# Altium PCB PCB_n.PcbDoc
Units mm, origin at the board's own origin, x right, y up, seen from the top; angles counter-clockwise.
Board outline 100.71 x 102.01 mm, 2 copper layers (Top Layer, Bottom Layer); 26 components, 31 nets, 100 pads, 7 vias.
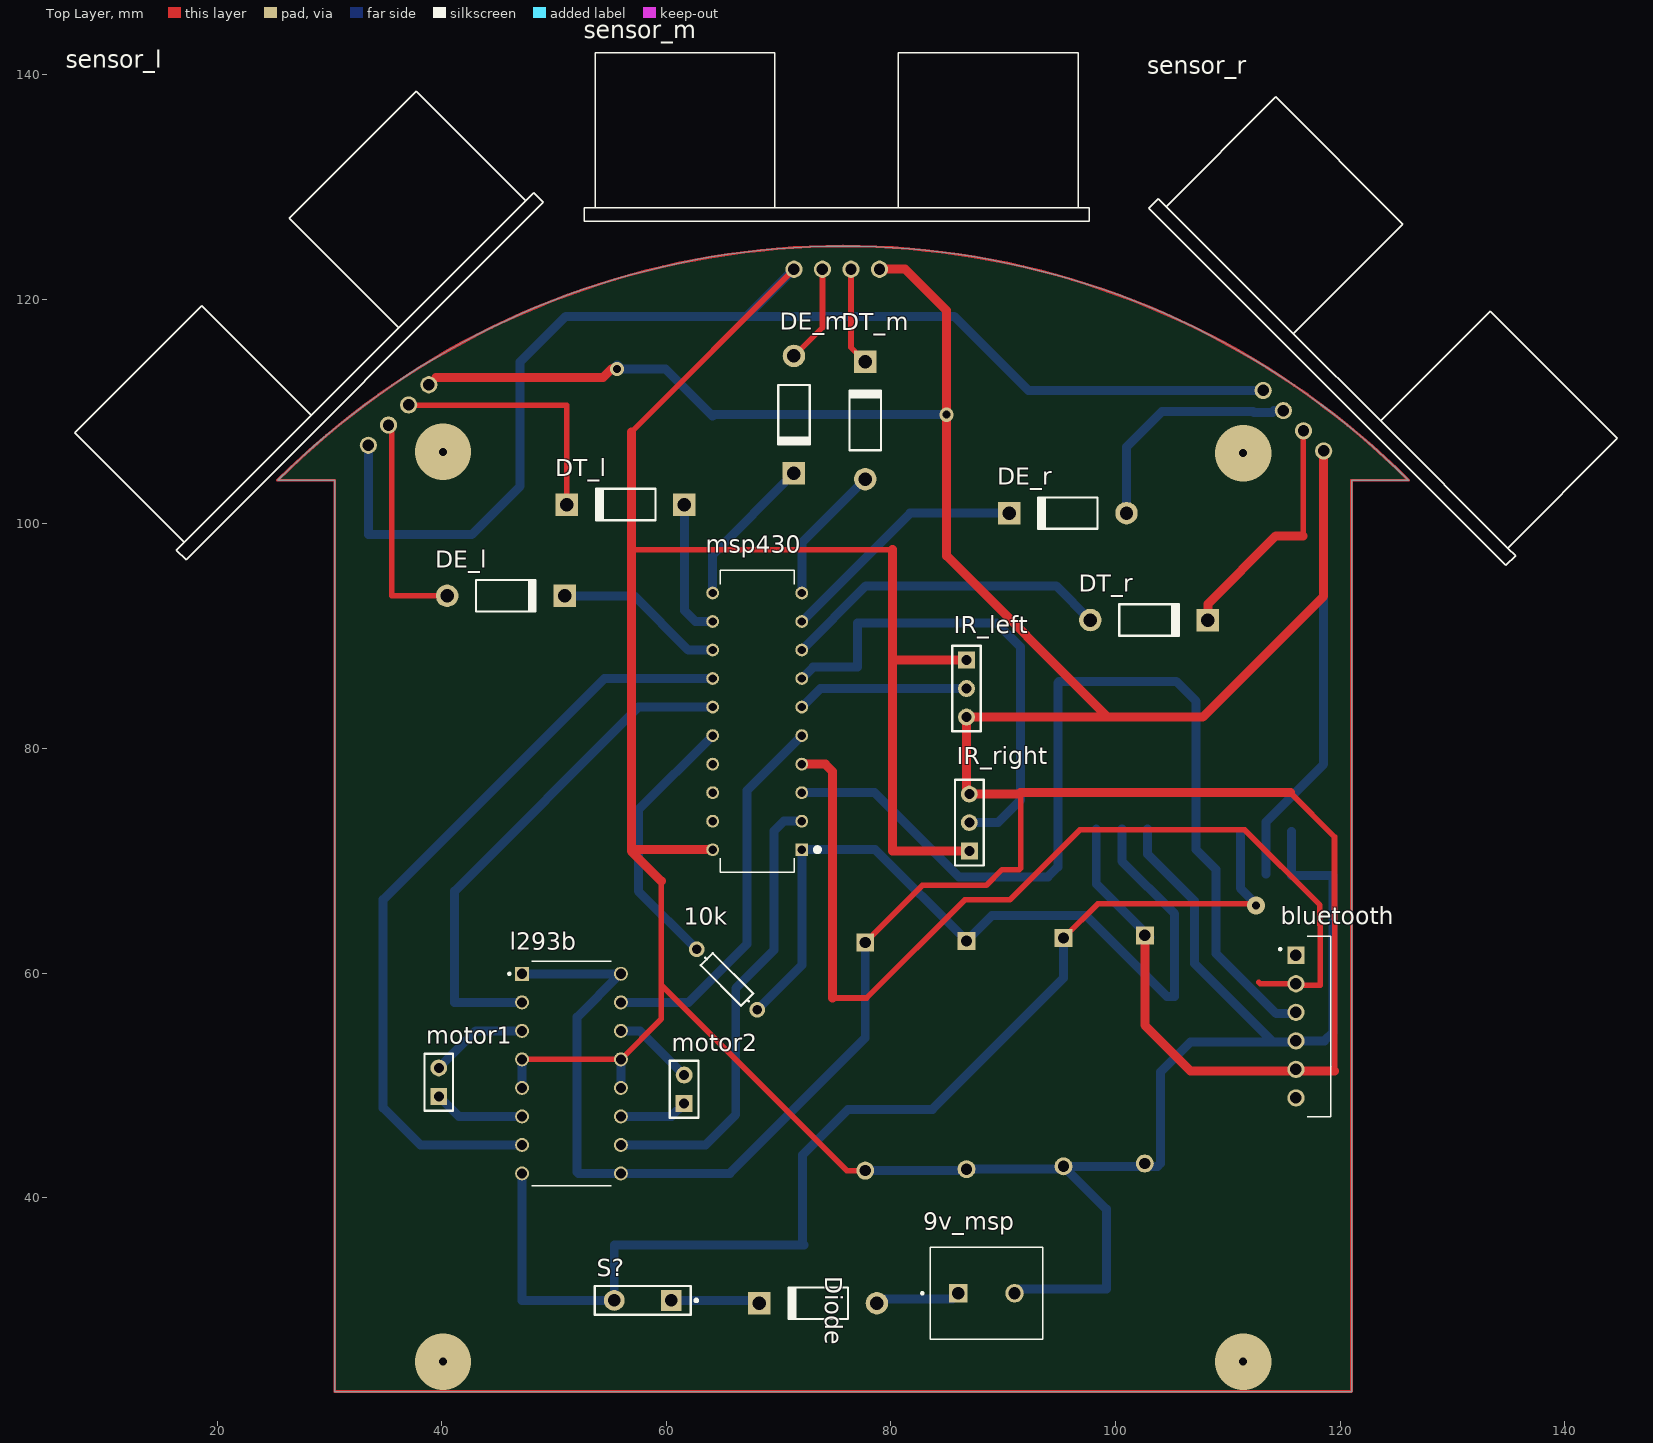
[diagram p0: Top Layer view]
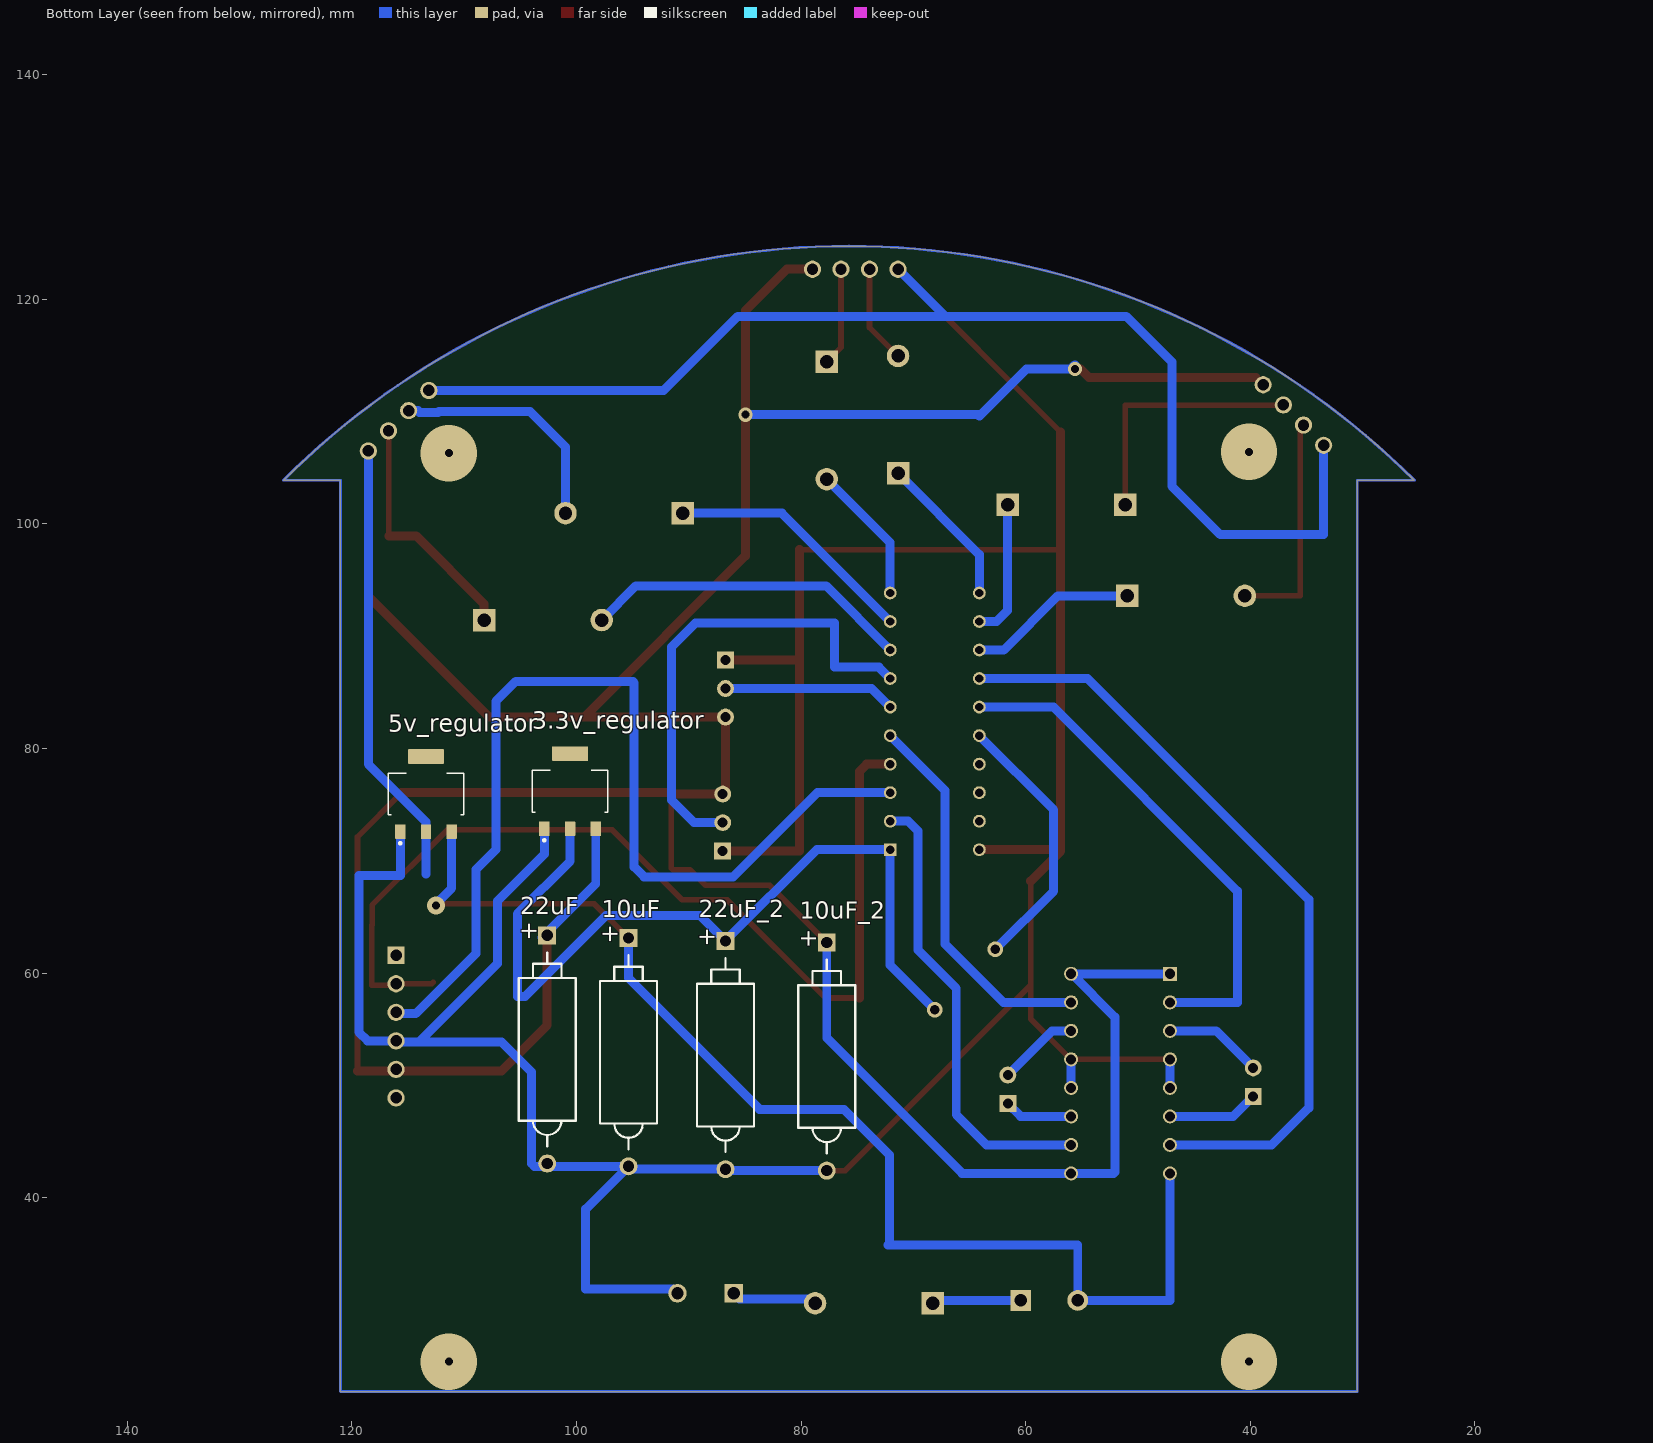
[diagram p1: Bottom Layer view, seen from below]

## Layer stack, top to bottom
Top Solder: solder mask 0.0102, Solder Resist, Dk 3.5
Top Layer: signal copper 0.0356
Dielectric 1: dielectric 0.32, FR-4, Dk 4.8
Bottom Layer: signal copper 0.0356
Bottom Solder: solder mask 0.0102, Solder Resist, Dk 3.5

## Board outline
30.48,22.733 30.48,103.886 25.4,103.886 cw(c75.755,53.53) 126.111,103.886 121.031,103.886 121.031,22.733

## Design rules (kind name [scope] priority, off if disabled: settings)
Clearance [All] p1: gap=0.8 ignorepadtopadclearanceinfootprint=FALSE
DiffPairsRouting [All] p1: maxlimit=0.6 minlimit=0.4 mostfreqgap=0.5 toplayer_minwidth=0.381 toplayer_maxwidth=0.6 toplayer_prefwidth=0.381 bottomlayer_minwidth=0.381 bottomlayer_maxwidth=0.6 bottomlayer_prefwidth=0.381 maxuncoupledlength=12.7
HoleSize [All] p1: absolutevalues=TRUE maxlimit=2.54 minlimit=0.7 maxpercent=80.000 minpercent=20.000
HoleToHoleClearance [All] p1: gap=0.7 allowstackedmicrovias=TRUE
MinimumSolderMaskSliver [All] p1: minsoldermaskwidth=0.7
PasteMaskExpansion [All] p1: expansion=0.5
PolygonConnect [All] p1: connectstyle=Relief reliefconductorwidth=0.254 reliefentries=4 polygonreliefangle="90 Angle" airgapwidth=0.254
RoutingVias [All] p1: holewidth=0.711 width=1.6 viastyle="Through Hole" minholewidth=0.711 minwidth=1.27 maxholewidth=0.711 maxwidth=1.27
SolderMaskExpansion [All] p1: expansion=0.3 useseparateexpansions=TRUE expansionbottom=0.3
Width [All] p1: maxlimit=1 minlimit=0.4 preferedwidth=0.8 toplayer_prefwidth=0.5 minimp=50.000000 maximp=50.000000 favimp=50.000000
25 further rules are at their usual default settings.

## Components (designator, comment, footprint, x,y, rotation, side; value= is the part's Value field where it differs from the comment)
3.3v_regulator "AMS1117-3.3" SOT229P700X180-4N 100.584,76.2 r180 bottom
5v_regulator "AMS1117-5.0" SOT229P700X180-4N 113.411,75.946 r180 bottom
9v_msp "282836-2" CONN_282836-2 88.519,31.496 r0 top
10k "Res1" AXIAL-0.3 65.405,59.436 r135 top value=1K
10uF "Cap Pol2" POLAR0.8 95.377,52.959 r90 bottom value=10uF
10uF_2 "Cap Pol2" POLAR0.8 77.724,52.578 r90 bottom value=100pF
22uF "Cap Pol2" POLAR0.8 102.616,53.213 r90 bottom value=100pF
22uF_2 "Cap Pol2" POLAR0.8 86.741,52.705 r90 bottom value=100pF
bluetooth "ZC142200" MODULE_ZC142200 116.078,55.245 r0 top
DE_l "Diode 1N4001" DO-41#1 45.72,93.599 r0 top
DE_m "Diode 1N4001" DO-41#1 71.374,109.728 r270 top
DE_r "Diode 1N4001" DO-41#1 95.758,100.965 r180 top
Diode "Diode 1N4001" DO-41#1 73.533,30.607 r180 top
DT_l "Diode 1N4001" DO-41#2 56.388,101.727 r180 top
DT_m "Diode 1N4001" DO-41#1 77.724,109.22 r90 top
DT_r "Diode 1N4001" DO-41#1 102.997,91.44 r0 top
IR_left "Header 3" HDR1X3 86.741,87.884 r270 top
IR_right "Header 3" HDR1X3 86.995,70.866 r90 top
l293b "L293D" DIP880W50P254L2000H510Q16 51.562,51.054 r0 top
motor1 "Header 2" HDR1X2 39.751,49.022 r90 top
motor2 "Header 2" HDR1X2 61.595,48.387 r90 top
msp430 "MSP430G2553IN20" DIP794W45P254L2692H508Q20 68.105,82.423 r180 top
S? "SW-SPST" SPST-2 57.912,30.861 r180 top
sensor_l "HC-SR04" XCVR_HC-SR04 36.168,109.701 r225 top
sensor_m "HC-SR04" XCVR_HC-SR04 75.184,122.682 r180 top
sensor_r "HC-SR04" XCVR_HC-SR04 115.851,109.193 r135 top

## Footprints (in the part's own frame and the unit in brackets; to place one, negate y for a bottom-side part, rotate by r counter-clockwise, add the part's x,y. Pads: shape width x height; smd on the part's side, far side on the other; paste and mask are expansions set on the pad)
AXIAL-0.3 [mm] "Axial Device, Thru-Hole; 2 Leads; 0.3 in Pin Spacing"
  round 1.4 hole 0.85: 1(-3.81,0) 2(3.81,0)
  silkscreen extent -2.77,-0.76 2.77,0.76
CONN_282836-2 [mm]
  rect 1.65x1.65 hole 1.1: 1(-2.5,0)
  round 1.65 hole 1.1: 2(2.5,0)
  silkscreen extent -5.8,-4.1 5,4.1
DIP794W45P254L2692H508Q20 [mm]
  rect 1.14x1.14 hole 0.74: 1(-3.97,11.43)
  round 1.14 hole 0.74: 2(-3.97,8.89) 3(-3.97,6.35) 4(-3.97,3.81) 5(-3.97,1.27) 6(-3.97,-1.27) 7(-3.97,-3.81) 8(-3.97,-6.35) 9(-3.97,-8.89) 10(-3.97,-11.43) 11(3.97,-11.43) 12(3.97,-8.89) 13(3.97,-6.35) 14(3.97,-3.81) 15(3.97,-1.27) 16(3.97,1.27) 17(3.97,3.81) 18(3.97,6.35) 19(3.97,8.89) 20(3.97,11.43)
  silkscreen extent -5.57,-13.46 3.3,13.46
DIP880W50P254L2000H510Q16 [mm]
  rect 1.25x1.25 hole 0.9: 1(-4.4,8.89)
  round 1.25 hole 0.9: 2(-4.4,6.35) 3(-4.4,3.81) 4(-4.4,1.27) 5(-4.4,-1.27) 6(-4.4,-3.81) 7(-4.4,-6.35) 8(-4.4,-8.89) 9(4.4,-8.89) 10(4.4,-6.35) 11(4.4,-3.81) 12(4.4,-1.27) 13(4.4,1.27) 14(4.4,3.81) 15(4.4,6.35) 16(4.4,8.89)
  silkscreen extent -5.62,-10 3.55,10
DO-41#1 [mm] "Diode, Axial; Body 5.2 x 2.7 mm (LxDia. max), Lead Dia. 0.86 mm (max)"
  round 2 hole 1.2: 1(-5.23,0)
  rect 2x2 hole 1.2: 2(5.23,0)
  silkscreen extent -2.65,-1.4 2.75,1.4
DO-41#2 [mm] "Diode, Axial; Body 5.2 x 2.7 mm (LxDia. max), Lead Dia. 0.86 mm (max)"
  rect 2x2 hole 1.2: 1(-5.23,0) 2(5.23,0)
  silkscreen extent -2.65,-1.4 2.75,1.4
HDR1X2 [mm] "Connector; Header; 2 Position"
  rect 1.5x1.5 hole 0.9: 1(0,0)
  round 1.5 hole 0.9: 2(2.54,0)
  silkscreen extent -1.27,-1.27 3.81,1.27
HDR1X3 [mm] "Connector; Header; 3 Position"
  rect 1.5x1.5 hole 0.9: 1(0,0)
  round 1.5 hole 0.9: 2(2.54,0) 3(5.08,0)
  silkscreen extent -1.27,-1.27 6.35,1.27
MODULE_ZC142200 [mm]
  rect 1.53x1.53 hole 1.02: 1(0,6.35)
  round 1.53 hole 1.02: 2(0,3.81) 3(0,1.27) 4(0,-1.27) 5(0,-3.81) 6(0,-6.35)
  silkscreen extent -1.5,-8.05 3.1,8.05
POLAR0.8 [mm] "Polarized Capacitor; 2 Leads"
  rect 1.6x1.6 hole 1: 1(10.16,0)
  round 1.6 hole 1: 2(-10.16,0)
  silkscreen extent -8.64,-2.54 8.64,2.54
SOT229P700X180-4N [mm]
  rrect15% 0.93x1.31 smd: 1(-2.29,-3.345) 2(0,-3.345) 3(2.29,-3.345)
  rrect15% 3.24x1.31 smd: 4(0,3.345)
  silkscreen extent -3.36,-4.47 3.36,1.86
SPST-2 [mm] "Switch; 2 Leads"
  rect 1.85x1.85 hole 1.1: 1(-2.54,0)
  round 1.85 hole 1.1: 2(2.54,0)
  silkscreen extent -4.89,-1.27 4.28,1.27
XCVR_HC-SR04 [mm]
  round 1.53 hole 1.02: 1(-3.81,0) 2(-1.27,0) 3(1.27,0) 4(3.81,0)
  silkscreen extent -22.5,-19.27 22.5,-4.27

## Part data
3.3v_regulator: "Sot223/Pkg 1-Amp 3.3-Volt Low Drop Out Voltage Regulatator", Package=None, Availability=Unavailable, MF="Advanced Monolithic Systems", MP=AMS1117-3.3, Price=None, SnapEDA_Link=https://www.snapeda.com/parts/AMS1117-3.3/Advanced%20Monolithic%20Systems/view-part/53450/?ref=snap
5v_regulator: "Sot223/Pkg 1-Amp 5-Volt Low Drop Out Voltage Regulatator", Package=None, Availability=Unavailable, MF="Advanced Monolithic Systems", MP=AMS1117-5.0, Price=None, SnapEDA_Link=https://www.snapeda.com/parts/AMS1117-5.0/Advanced%20Monolithic%20Systems/view-part/184433/?ref=snap
9v_msp: "Connector, Terminal Block; Wire Receptacle; 2 Pos.; 16-30 AWG; 0.197 in. CL; Sid", Package=None, Availability=Unavailable, Centerline_Pitch="5 mm[.197 in]", EU_RoHS_Compliance="Compliant with Exemptions", MF="TE Connectivity", MP=282836-2, Number_of_Positions=2, Price=None, SnapEDA_Link=https://www.snapeda.com/parts/282836-2/TE%20Connectivity%20AMP%20Connectors/view-part/492233/?ref=snap, TE_purchase_URL=https://www.te.com/usa-en/product-282836-2.html?te_bu=Cor&te_type=disp&te_campaign=seda_glo_cor-seda-global-disp-prtnr-fy19-seda-model-bom-cta_sma-317_1&elqCampaignId=32493
10k: "Resistor", LatestRevisionDate=17-Jul-2002, LatestRevisionNote="Re-released for DXP Platform.", PackageDescription="Axial Device, Thru-Hole; 2 Leads; 0.3 in Pin Spacing", PackageReference=AXIAL-0.3, Published=8-Jun-2000, Publisher="Altium Limited"
10uF 10uF_2 22uF 22uF_2: "Polarized Capacitor (Axial)", LatestRevisionDate=17-Jul-2002, LatestRevisionNote="Re-released for DXP Platform.", PackageDescription="Polarized Capacitor; 2 Leads", PackageReference=POLAR0.8, Published=8-Jun-2000, Publisher="Altium Limited"
bluetooth: "1pc HC-05 6 Pin Wireless Bluetooth RF Transceiver Module Serial For Arduino", Package=None, Availability=Unavailable, MF=YKS, MP=ZC142200, Price=None, SnapEDA_Link=https://www.snapeda.com/parts/ZC142200/YKS/view-part/618924/?ref=snap
DE_l DE_m DE_r Diode DT_l DT_m DT_r: "1 Amp General Purpose Rectifier", Code_JEDEC=DO-204-AL, ComponentLink1Description="Manufacturer Link", ComponentLink1URL=http://www.fairchildsemi.com/, ComponentLink2Description=Datasheet, ComponentLink2URL=http://www.fairchildsemi.com/ds/1N%2F1N4001.pdf, DatasheetVersion=1998, LatestRevisionDate=17-Jul-2002, LatestRevisionNote="Re-released for DXP Platform.", PackageDescription="Diode, Axial; Body 5.2 x 2.7 mm (LxDia. max), Lead Dia. 0.86 mm (max)", PackageReference=DO-41, PackageVersion=Aug-1999, Published=8-Jun-2000, Publisher="Altium Limited"
IR_left IR_right: "Header, 3-Pin", LatestRevisionDate=17-Jul-2002, LatestRevisionNote="Re-released for DXP Platform.", Publisher="Altium Limited"
l293b: "Bipolar Motor Driver Parallel 16-PowerDIP", Package="SOIC-20 STMicroelectronics", Availability=Unavailable, MF=STMicroelectronics, MP=L293D, Price=None, SnapEDA_Link=https://www.snapeda.com/parts/L293D/STMicroelectronics/view-part/83726/?ref=snap
motor1 motor2: "Header, 2-Pin", LatestRevisionDate=17-Jul-2002, LatestRevisionNote="Re-released for DXP Platform.", Publisher="Altium Limited"
msp430: "MSP430 MSP430G2xx Microcontroller IC 16-Bit 16MHz 16KB _16K x 8_ FLASH 20-PDIP", Package="PDIP-20 Texas Instruments", Availability=Unavailable, MF="Texas Instruments", MP=MSP430G2553IN20, Price=None, SnapEDA_Link=https://www.snapeda.com/parts/MSP430G2553IN20/Texas%20Instruments/view-part/46372/?ref=snap
S?: "Single-Pole, Single-Throw Switch", LatestRevisionDate=17-Jul-2002, LatestRevisionNote="Re-released for DXP Platform.", PackageDescription="Switch; 2 Leads", PackageReference=SPST-2, Published=24-Mar-1999, Publisher="Altium Limited"
sensor_l sensor_m sensor_r: "HC-SR04 Ultrasonic Sensor Platform Evaluation Expansion Board", Package=None, Availability=Unavailable, MF="SparkFun Electronics", MP=HC-SR04, Price=None, SnapEDA_Link=https://www.snapeda.com/parts/HC-SR04/SparkFun%20Electronics/view-part/341106/?ref=snap

## Via types
v1: diameter 5, hole 0.711, Top Layer to Bottom Layer, 4 vias
v2: diameter 1.27, hole 0.711, Top Layer to Bottom Layer, 2 vias
v3: diameter 1.6, hole 0.711, Top Layer to Bottom Layer, 1 vias

## Nets (pads, with @x,y where several pads share a name; then routed paths per layer and width w, separated by ;. In a path a pad name is that pad's centre, name@x,y a point inside that pad or via, vN(x,y) a via of type N, cw(c..) or ccw(c..) an arc to the next point about the centre after c; other vN are vias at no path point)
3.3v: 3.3v_regulator.2 10k.1 22uF_2.1 msp430.1 | length 73.3
  Bottom Layer w0.8: 10k.1 72.075,60.718 msp430.1 78.613,70.993 22uF_2.1 89.002,65.126 97.384,65.126 104.597,57.912 105.283,57.912 105.283,65.278 100.584,69.977 3.3v_regulator.2
5v: 3.3v_regulator.3 5v_regulator.2 10uF_2.1 22uF.1 bluetooth.5 IR_left.3 IR_right.3 l293b.1 l293b.9 l293b.16 sensor_l.1 sensor_m.1 sensor_r.1 | length 378.1
  Top Layer w0.5: sensor_l.1 39.497,113.03 ; v2@55.118,113.792 v2(55.626,113.792) ; 10uF_2.1 82.809,67.823 88.524,67.823 89.916,69.215 91.44,69.215 ; IR_right.3@86.741,76.2 IR_right.3 ; 91.567,69.342 91.567,75.946 91.567,76.073 ; 115.57,76.073 119.507,72.136 119.507,64.83 119.537,64.8 119.537,58.39 119.507,58.36 119.507,51.308
  Top Layer w0.8: 39.497,113.03 54.356,113.03 v2@55.118,113.792 ; sensor_m.1 81.28,122.682 84.963,118.999 v2(84.963,109.728) 84.963,97.155 99.251,82.867 ; IR_right.3@86.741,76.2 IR_left.3 107.772,82.804 118.545,93.577 sensor_r.1 ; IR_right.3 91.567,75.946 ; 91.567,76.073 115.57,76.073 ; 22uF.1 102.616,55.372 106.68,51.308 119.507,51.308
  Bottom Layer w0.8: l293b.1 l293b.16@55.921,59.944 ; v2(55.626,113.792) 55.626,114.173 56.007,113.792 59.944,113.792 64.135,109.601 64.262,109.728 v2(84.963,109.728) ; l293b.16 l293b.16@55.921,59.944 ; 10uF_2.1 77.724,54.229 65.659,42.164 l293b.9 52.197,42.164 52.07,42.291 52.07,56.093 l293b.16@55.921,59.944 ; 3.3v_regulator.3 98.294,67.949 22uF.1@103.06,63.182 ; 113.411,68.834 5v_regulator.2 113.411,73.482 118.545,78.616 sensor_r.1
9v: 5v_regulator.3 10uF.1 l293b.8 S?.2 | length 108.4
  Top Layer w0.5: 10uF.1 98.425,66.167 112.395,66.167 v3(112.522,66.04)
  Bottom Layer w0.8: l293b.8 47.162,30.861 S?.2 55.372,35.814 72.263,35.814 72.136,35.941 72.136,43.815 76.2,47.879 83.693,47.879 95.377,59.563 10uF.1 ; 5v_regulator.3 111.121,67.568 v3@112.649,66.04
E_l: DE_l.2 msp430.13 | length 15.2
  Bottom Layer w0.8: DE_l.2 57.15,93.599 61.976,88.773 msp430.13
E_m: DE_m.2 msp430.11 | length 13.6
  Bottom Layer w0.8: msp430.11 64.135,97.259 DE_m.2
E_r: DE_r.2 msp430.9 | length 22.5
  Bottom Layer w0.8: msp430.9 81.727,100.965 DE_r.2
GND: 3.3v_regulator.1 5v_regulator.1 9v_msp.2 10uF.2 10uF_2.2 22uF.2 22uF_2.2 bluetooth.4 IR_left.1 IR_right.1 l293b.4 l293b.5 l293b.12 l293b.13 msp430.20 sensor_l.4 sensor_m.4 sensor_r.4 | length 419.5
  Top Layer w0.5: l293b.4 l293b.13 59.563,55.925 59.563,68.199 ; 56.896,97.714 80.137,97.714 ; 56.896,108.204 sensor_m.4 ; 59.563,58.928 76.073,42.418 10uF_2.2 ; 22uF_2.2 22uF_2.2@87.249,42.545
  Top Layer w0.8: 56.896,70.993 msp430.20 ; 56.896,108.204 56.896,70.866 59.563,68.199 ; 80.137,97.714 80.137,87.884 ; IR_left.1 80.137,87.884 ; IR_right.1 80.137,70.866 80.137,87.884
  Bottom Layer w0.8: sensor_l.4 33.474,99.06 42.672,99.06 46.99,103.378 46.99,114.427 51.054,118.491 67.183,118.491 sensor_m.4 sensor_m.4@71.628,122.428 ; l293b.5 l293b.4 ; l293b.12 l293b.13 ; 65.659,118.491 85.649,118.491 92.253,111.887 sensor_r.4 ; 10uF_2.2 86.614,42.418 22uF_2.2 95.123,42.545 10uF.2 ; 9v_msp.2 91.4,31.877 99.187,31.877 99.187,38.989 10uF.2 ; 3.3v_regulator.1 102.874,70.608 107.061,66.421 107.061,60.85 114.063,53.848 ; bluetooth.4@115.57,53.975 bluetooth.4@115.697,53.975 ; 5v_regulator.1 115.701,68.707 119.38,68.707 119.38,54.737 118.618,53.975 bluetooth.4@115.697,53.975 ; 10uF.2 103.759,42.799 104.013,43.053 104.013,51.181 106.68,53.848 114.063,53.848 ; 114.063,53.848 115.57,53.848 bluetooth.4@115.697,53.975
IR_l_out: IR_left.2 msp430.6 | length 15.3
  Bottom Layer w0.8: msp430.6 73.726,85.344 IR_left.2
IR_r_out: IR_right.2 msp430.7 | length 43.7
  Bottom Layer w0.8: msp430.7 73.091,87.249 77.028,87.249 77.028,91.186 89.408,91.186 91.567,89.027 91.567,75.438 89.535,73.406 IR_right.2
left1: l293b.6 motor1.1 | length 8.1
  Bottom Layer w0.8: motor1.1 41.529,47.244 l293b.6
left2: l293b.11 motor2.1 | length 6.1
  Bottom Layer w0.8: l293b.11 60.452,47.244 motor2.1
m1_b: l293b.7 msp430.14 | length 69.8
  Bottom Layer w0.8: l293b.7 38.1,44.704 34.798,48.006 34.798,66.548 54.483,86.233 msp430.14
m1_f: l293b.2 msp430.15 | length 45.7
  Bottom Layer w0.8: l293b.2 41.148,57.404 41.148,67.31 57.531,83.693 msp430.15
m2_b: l293b.10 msp430.2 | length 40.9
  Bottom Layer w0.8: l293b.10 63.5,44.704 66.192,47.396 66.192,58.649 69.596,62.052 69.596,72.644 70.485,73.533 msp430.2
m2_f: l293b.15 msp430.5 | length 34
  Bottom Layer w0.8: l293b.15 62.001,57.404 67.183,62.586 67.183,76.261 msp430.5
Net9v_msp_1: 9v_msp.1 Diode.1 | length 7.6
  Bottom Layer w0.8: Diode.1 79.144,30.988 85.511,30.988 9v_msp.1
Net10k_2: 10k.2 msp430.16 | length 23.9
  Bottom Layer w0.8: 10k.2 57.531,67.31 57.531,74.549 msp430.16
NetDE_l_1: DE_l.1 sensor_l.3 | length 20.3
  Top Layer w0.5: sensor_l.3 35.56,108.513 35.56,93.599 DE_l.1
NetDE_m_1: DE_m.1 sensor_m.3 | length 8.8
  Top Layer w0.5: DE_m.1 73.914,117.498 sensor_m.3
NetDE_r_1: DE_r.1 sensor_r.3 | length 21.3
  Bottom Layer w0.8: DE_r.1 100.988,106.855 104.14,110.007 112.258,110.007 112.343,109.922 113.971,109.922 114.14,110.091 sensor_r.3
NetDiode_2: Diode.2 S?.1 | length 8
  Bottom Layer w0.8: S?.1 68.049,30.861 Diode.2
NetDT_l_2: DT_l.2 sensor_l.2 | length 23
  Top Layer w0.5: sensor_l.2 37.066,110.58 51.158,110.58 DT_l.2
NetDT_m_2: DT_m.2 sensor_m.2 | length 8.8
  Top Layer w0.5: sensor_m.2 76.454,115.72 DT_m.2
NetDT_r_2: DT_r.2 sensor_r.2 | length 21.8
  Top Layer w0.5: 116.713,98.933 116.713,108.295 sensor_r.2
  Top Layer w0.8: DT_r.2 108.227,92.86 114.3,98.933 116.713,98.933
right1: l293b.3 motor1.2 | length 8.8
  Bottom Layer w0.8: motor1.2 43.053,54.864 l293b.3
right2: l293b.14 motor2.2 | length 7.3
  Bottom Layer w0.8: l293b.14 57.658,54.864 motor2.2
Rx: bluetooth.2 msp430.4 | length 88.2
  Top Layer w0.5: 74.803,57.785 77.851,57.785 86.589,66.523 90.587,66.523 96.834,72.771 111.506,72.771 118.207,66.07 118.207,64.292 118.237,64.262 118.237,58.928 bluetooth.2@115.57,58.928 ; 112.776,59.182 112.903,59.055 bluetooth.2@115.57,59.055
  Top Layer w0.8: msp430.4 74.168,78.613 74.803,77.978 74.803,57.785
T_l: DT_l.1 msp430.12 | length 12.3
  Bottom Layer w0.8: DT_l.1 61.618,92.306 62.611,91.313 msp430.12
T_m: DT_m.1 msp430.10 | length 12.5
  Bottom Layer w0.8: msp430.10 72.075,98.341 DT_m.1
T_r: DT_r.1 msp430.8 | length 29.3
  Bottom Layer w0.8: msp430.8 77.79,94.488 94.719,94.488 DT_r.1
Tx: bluetooth.3 msp430.3 | length 87.8
  Bottom Layer w0.8: msp430.3 78.562,76.073 86.055,68.58 93.98,68.58 94.869,69.469 94.869,85.852 94.996,85.979 105.41,85.979 107.188,84.201 107.188,70.993 108.966,69.215 108.966,61.747 114.325,56.388 bluetooth.3@115.57,56.388
pads on no net: 3.3v_regulator.4 5v_regulator.4 bluetooth.1 bluetooth.6 msp430.17 msp430.18 msp430.19
copper on no net: | length 749.8
  Top Layer w0.254: 25.4,103.886 cw(c75.755,53.53) 126.111,103.886 121.031,103.886 121.031,22.733 30.48,22.733 30.48,103.886 25.4,103.886
  Bottom Layer w0.254: 25.4,103.886 cw(c75.755,53.53) 126.111,103.886 121.031,103.886 121.031,22.733 30.48,22.733 30.48,103.886 25.4,103.886
  other v1: 40.132,25.4 111.379,25.4 111.379,106.299 40.132,106.426

## Text inside footprints (layer, text, board x,y; h text height)
10uF: Bottom Overlay "+" at 96.327,62.611 h1.5 r270
10uF_2: Bottom Overlay "+" at 78.674,62.23 h1.5 r270
22uF: Bottom Overlay "+" at 103.566,62.865 h1.5 r270
22uF_2: Bottom Overlay "+" at 87.691,62.357 h1.5 r270